# Altium PCB PCB1.PcbDoc (part 2 of 2)
Units mm, origin at the board's own origin, x right, y up, seen from the top; angles counter-clockwise.
Board outline 33.15 x 40.75 mm, 6 copper layers (Top Layer, GND, Signal Layer 3, POWER, Signal Layer 1, Bottom Layer), stack 1.231 mm thick; 110 components, 115 nets, 492 pads, 238 vias.
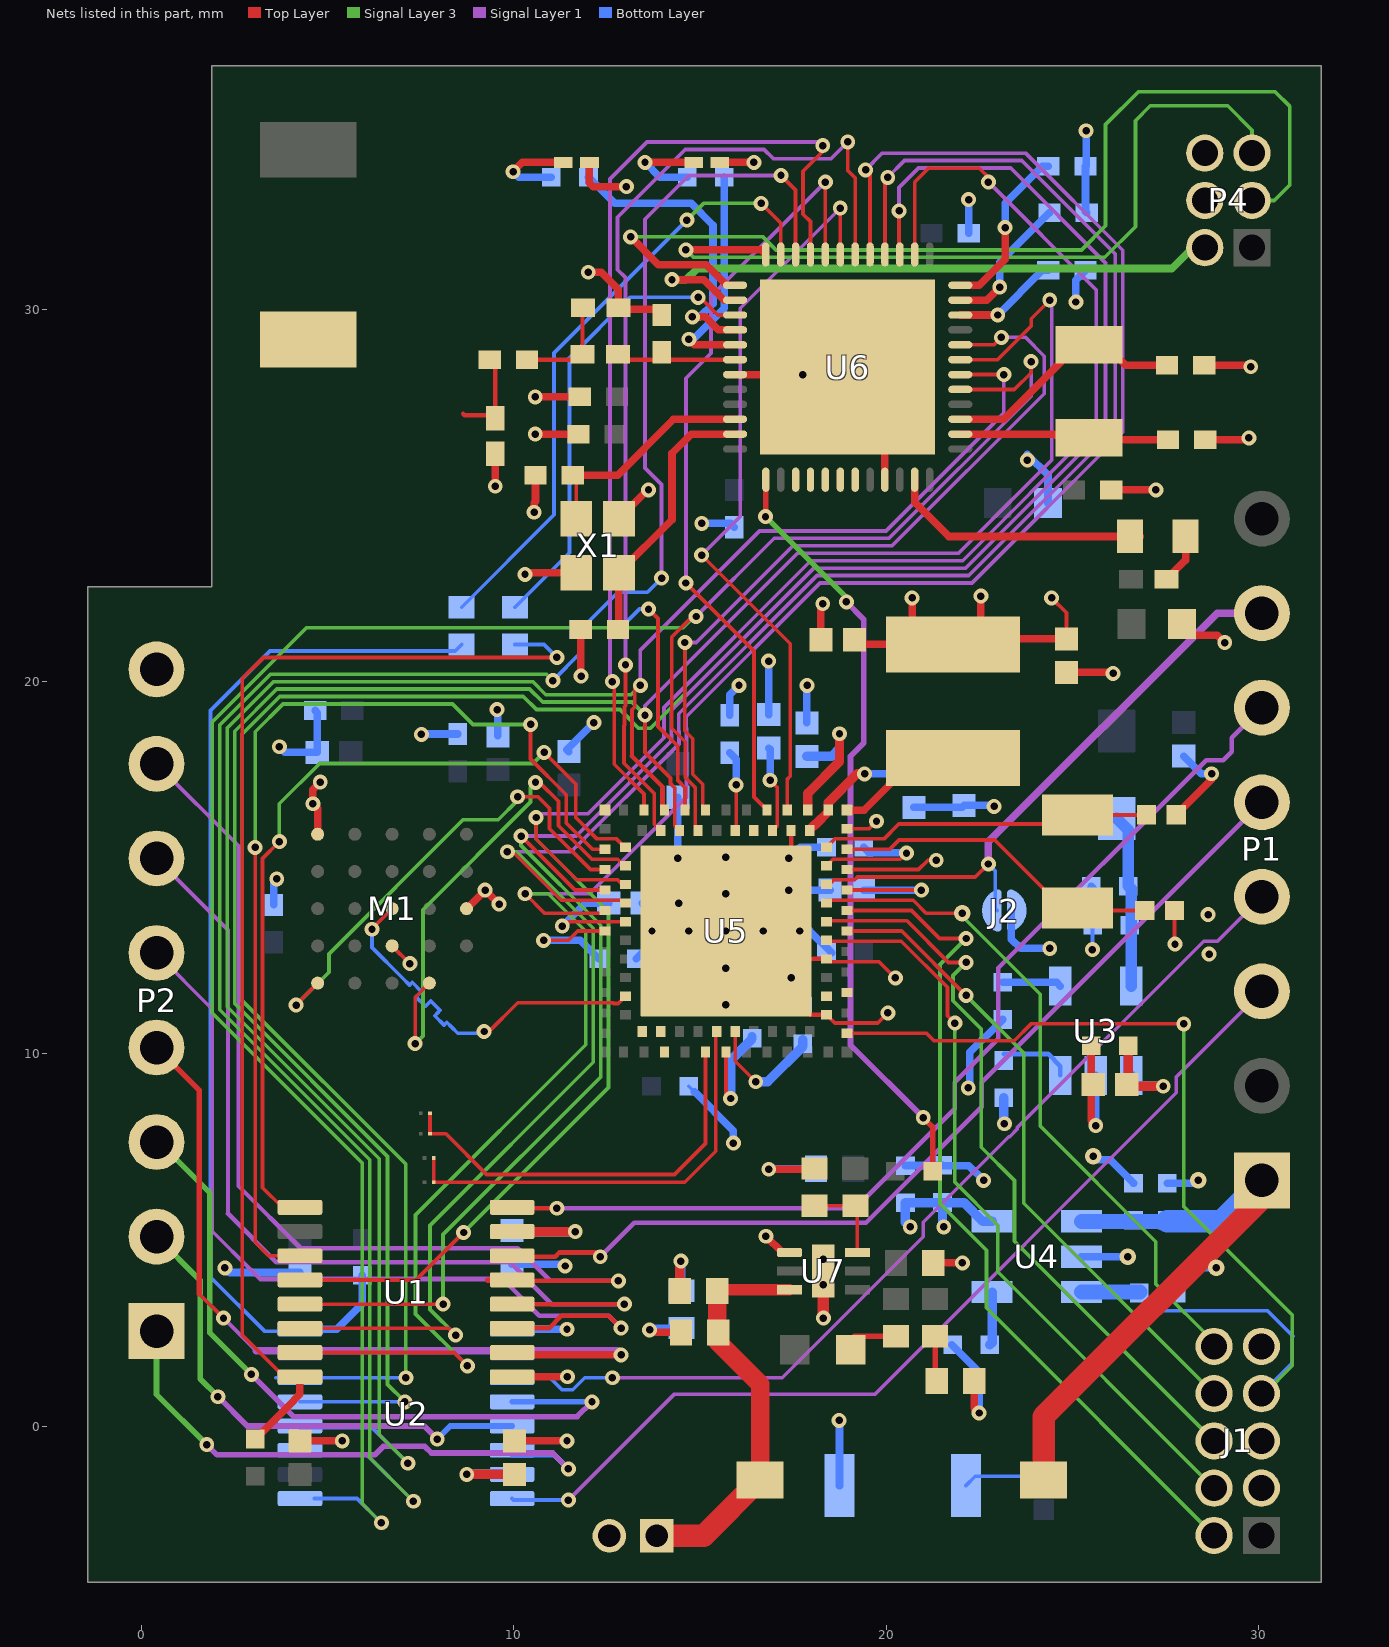
[diagram p6: the nets of this part, all layers, seen from the top]

## Via types
v1: diameter 0.4, hole 0.2, Top Layer to Bottom Layer, tented both sides, 130 vias
v2: diameter 0.4, hole 0.2, Top Layer to Bottom Layer, 86 vias
v3: diameter 0.66, hole 0.33, Top Layer to Bottom Layer, 16 vias
v4: diameter 0.45, hole 0.2, Top Layer to Bottom Layer, 5 vias
v5: diameter 0.45, hole 0.2, Top Layer to Bottom Layer, tented both sides, 1 vias

## Nets (pads, with @x,y where several pads share a name; then routed paths per layer and width w, separated by ;. In a path a pad name is that pad's centre, name@x,y a point inside that pad or via, vN(x,y) a via of type N, cw(c..) or ccw(c..) an arc to the next point about the centre after c; other vN are vias at no path point) (continued)
GND: C1.1 C2.2 C3.2 C4.2 C5.2 C6.1 C7.1 C8.1 C9.1 C10.1 C11.1 C12.1 C13.1 C14.1 C15.1 C16.1 C17.1 C18.1 C19.1 C20.1 C21.1 C22.1 C23.1 C24.1 C25.1 C26.1 C27.2 C29.1 C30.2 C31.1 C32.2 C33.1 C34.2 C35.2 C36.2 C37.2 C38.2 C39.2 C40.1 C41.1 C42.2 C43.1 C44.2 C45.2 C46.1 C47.1 C48.1 C49.2 C50.1 C52.1 C53.1 C54.1 C55.1 CObat1.2 D1.2 D2.2 J1.3 J1.5 J1.9 J2.2 M1.B3 M1.C1 M1.E5 P2.8 P4.4 P4.6 R6.2 R8.2 R9.2 R14.1 R15.1 R16.1 R17.1 SW1.2 U1.9 U2.9 U3.2 U4.2 U5.A31 U5.A33 U5.B21 U5.B24 U5.B32 U5.PAD U6.31 U6.45 U6.49 U7.1 U7.7 X1.2 X1.4 XX2.2 XX3.2 | length 123.4
  Top Layer w0.1: M1.B3@6.729,12.9 v1(7.207,12.422) ; U6.49@17.763,28.25 18.092,28.25 18.092,28.33 18.57,28.33 18.65,28.25 18.771,28.25 U6.49@18.971,28.45 ; U5.B21@18.4,11.05 18.625,10.825 19.775,10.825 v2(20.05,11.1) ; U5.B24@18.4,12.55 18.4,12.476 19.813,12.476 v1(20.25,12.039) ; U5.A31@18.95,14.95 20.875,14.95 21.125,15.2 v2(21.35,15.2) ; U5.A33@18.95,16.05 19.544,16.05 v1(19.744,16.25) ; v1@26.074,20.25 v1(26.102,20.222) ; C29.1@27.75,13.85 27.75,12.965 v1(27.765,12.95)
  Top Layer w0.125: U5.PAD@14.7,11.313 15.187,11.313 15.262,11.388 15.262,12.862 U5.PAD@15.7,13.3 ; U5.PAD@14.95,14.05 U5.PAD@15.7,13.3 ; U5.PAD@17.45,15.05 U5.PAD@15.7,13.3 ; U5.PAD@17.45,15.287 U5.B32@17.45,16 ; U5.B21@18.4,11.05 17.95,11.05 U5.PAD@16.5,12.5 ; U5.B24@18.4,12.55 16.55,12.55 U5.PAD@16.5,12.5 ; U5.A33@18.95,16.05 U5.A33@18.995,16.005 ; U5.PAD@15.7,13.3 U5.PAD@16.5,12.5
  Top Layer w0.203: C1.1@4.25,-0.4 v1(5.391,-0.4) ; M1.E5@4.729,15.9 4.729,16.591 v1(4.6,16.721) 4.6,17.1 v1(4.8,17.3) ; M1.C1@8.729,13.9 v1(9.229,14.4) v1(9.605,14.025) ; v1(9.5,25.251) 9.5,25.781 ; U1.9@9.954,1.325 v1(11.438,1.325) ; C27.2@10.015,-0.4 v1(11.429,-0.4) ; v2(10.301,22.879) 10.347,22.925 X1.2@11.675,22.925 ; v1(10.544,24.55) 10.544,24.811 10.582,24.85 C36.2@10.582,25.55 ; v2(10.575,26.65) C39.2@11.737,26.65 ; v2(10.575,27.65) C40.1@11.772,27.65 ; C36.2@10.592,25.583 C36.2@10.625,25.55 ; C45.2@11.801,21.4 11.801,20.157 v2(11.809,20.149) ; v1(12,31) 12.352,31 12.809,30.543 XX2.2@12.809,30.05 12.859,30 13.82,30 C41.1@13.97,29.85 ; D1.2@12.032,33.95 12.032,33.406 12.139,33.3 v2(13.025,33.3) ; X1.4@12.825,24.375 13.6,25.15 v2(13.619,25.15) ; v1(13.648,2.583) 13.712,2.519 C50.1@14.49,2.519 ; v1(14.4,15.258) U5.PAD@14.4,15.287 ; D2.2@15.538,33.95 v2(16.451,33.95) ; U6.31@15.946,28.25 15.946,28.248 16.817,28.248 16.817,28.382 17.631,28.382 17.763,28.25 v1(17.765,28.248) ; v1(16.771,5.1) 17.208,4.663 U7.1@17.405,4.663 ; v1(16.85,6.9) 18.058,6.9 R16.1@18.076,6.918 ; v1(17.45,12.05) U5.PAD@17.45,12.095 ; C20.1@18.25,21.125 18.25,22.044 v1(18.3,22.094) ; U6.49@18.971,28.45 19.195,28.226 19.039,28.226 19.039,27.63 19.351,27.318 19.947,27.318 19.947,27.474 19.971,27.45 19.971,27.002 20.103,27.002 20.103,26.43 19.971,26.298 U6.45@19.971,25.425 ; R15.1@21.267,4.383 v1(22.05,4.383) ; R14.1@22.367,1.213 22.367,0.483 v2(22.5,0.35) ; C19.1@24.85,20.25 v1@26.074,20.25 ; C5.2@25.51,10.221 25.51,8.197 v2(25.635,8.072) ; C44.2@26.05,25.15 v1(27.25,25.15) ; C22.1@27.8,16.425 28.75,17.375 v1(28.75,17.526) ; C43.1@27.95,21.55 27.95,21.25 28.898,21.25 v2(29.1,21.048) ; C37.2@28.55,28.5 29.759,28.5 v2(29.8,28.459) ; C34.2@28.577,26.5 29.7,26.5 v2(29.75,26.55)
  Top Layer w0.305: v1(18.317,2.9) v1(18.317,3.8) U7.7@18.317,4.163 v1(18.317,4.483)
  Signal Layer 1 w0.203: v1@4.777,17.304 4.796,17.304 v1(4.8,17.3) ; v1(17.765,28.248) v1@17.768,28.25
  Bottom Layer w0.1: C11.1@14.7,9.13 C11.1@14.855,8.975 ; v1@17.78,19.8 v1@17.873,19.893 ; v1@22.879,16.675 v1(22.904,16.65) ; C3.2@25.51,14.507 25.51,13.49 C4.2@25.55,13.45 25.55,12.806 v1(25.544,12.8)
  Bottom Layer w0.125: C10.1@17.768,11.275 C10.1@17.825,11.332
  Bottom Layer w0.203: v1(2.238,4.25) 2.362,4.125 C25.1@4.254,4.125 ; C21.1@3.55,14 3.55,14.621 v2(3.629,14.7) ; v1(3.7,18.25) 3.85,18.1 C26.1@4.718,18.1 4.718,19.168 C53.1@4.662,19.225 ; v1(4.8,17.3) v1@4.8,17.367 ; v1(7.519,18.584) 7.528,18.594 C54.1@8.495,18.594 ; v1(9.55,19.25) 9.57,19.23 C18.1@9.57,18.544 ; C2.2@9.951,4.35 11.326,4.35 v1(11.376,4.3) ; U2.9@9.954,2.6 v1(11.429,2.6) ; C9.1@11.48,18.12 11.425,18.175 v1(12.15,18.9) ; C12.1@13.286,12.55 13.713,12.977 U5.PAD@13.713,13.3 ; C14.1@13.45,14.05 v1(14.433,14.05) 14.433,13.467 U5.PAD@14.65,13.25 ; v1(13.648,2.583) 13.698,2.633 R17.1@14.5,2.633 ; v1(14.4,15.258) 14.408,15.25 C15.1@14.408,16.894 ; C11.1@14.855,8.975 15.9,7.93 v1(15.9,7.6) ; v2(15.05,24.25) 15.822,24.25 C38.2@15.922,24.15 ; U5.PAD@15.7,11.313 15.807,11.42 C8.1@16.409,11.42 ; C55.1@15.8,19.094 15.8,19.65 v1(16.05,19.9) ; v1(16.846,20.55) 16.85,20.546 C17.1@16.85,19.113 ; v1(16.85,6.9) 16.863,6.913 C52.1@18.117,6.913 ; v1(17.393,14.4) C7.1@18.5,14.4 ; v1(17.393,15.25) 17.693,15.55 C6.1@18.4,15.55 ; v1(17.45,12.05) 17.768,11.732 C10.1@17.768,11.275 ; U5.PAD@17.687,13.3 17.95,13.3 C13.1@18.537,12.712 ; C16.1@17.873,18.893 v1@17.873,19.893 ; v1(18.738,0.15) 18.75,0.138 SW1.2@18.75,-1.6 ; C32.2@20.522,6.994 22.227,6.994 v1(22.622,6.6) ; C32.2@20.532,7.005 C33.1@21.517,7.005 ; C24.1@20.75,16.623 22.048,16.623 C23.1@22.1,16.675 v1@22.879,16.675 ; C31.1@21.764,2.181 22.5,1.445 v2(22.5,0.35) ; v2(22.21,9.083) 22.252,9.124 22.252,10.041 C30.2@23.132,10.922 ; v2(22.219,32.95) 22.222,32.947 C42.2@22.222,32.05 ; J2.2@23.367,13.85 23.367,13.083 23.616,12.834 v1(24.4,12.834) v1@24.404,12.838 ; v2(23.8,25.95) 23.8,26.102 24.353,25.549 C35.2@24.353,24.8 ; v2(25.1,30.2) 25.1,30.79 R9.2@25.36,31.05 ; U4.2@25.25,4.549 v5(26.493,4.549) ; v1(25.377,34.8) 25.377,33.85 R6.2@25.36,33.85 25.36,32.632 R8.2@25.392,32.6 ; C3.2@25.51,14.507 25.55,14.468 C4.2@25.55,13.45 ; v4(25.567,7.25) 25.567,7.15 26.025,7.15 C49.2@26.65,6.525 ; v2(25.635,8.072) U3.2@25.635,9.42 ; C48.1@27.554,6.525 28.315,6.525 v4(28.39,6.6) ; C47.1@28,18 28.474,17.526 v1(28.75,17.526)
  other v1: 17.88,19.9
GPIO_A2_1V8: U1.3 U5.A2 | length 27.4
  Top Layer w0.1: v2(3.05,15.545) 3.05,4.938 3.413,4.575 U1.3@4.254,4.575 ; v2(10.45,18.85) 10.45,17.92 11.409,16.962 11.409,16.2 12.109,15.5 U5.A2@12.45,15.5
  Signal Layer 3 w0.1: v2(3.05,15.545) 3.05,18.654 3.796,19.4 8.35,19.4 8.9,18.85 v2(10.45,18.85)
GPIO_A2_3V0: P1.5 U1.14 | length 25.7
  Top Layer w0.125: U1.14@9.954,4.575 9.98,4.549 11.112,4.549 11.226,4.662 12.208,4.662 v1(12.322,4.549)
  Signal Layer 1 w0.125: v1(12.322,4.549) 13.235,5.463 19.463,5.463 22.573,8.573 22.573,9.233 P1.5@30.1,16.76
GPIO_A3_1V8: U1.1 U5.B1 | length 23.2
  Top Layer w0.1: v2(3.7,15.7) 3.25,15.25 3.25,6.404 3.779,5.875 U1.1@4.254,5.875 ; v1(10.814,18.1) 11.663,17.25 11.663,16.35 12.238,15.775 12.76,15.775 12.993,15.543 U5.B1@13,15.55
  Signal Layer 3 w0.1: v2(3.7,15.7) 3.7,16.717 4.783,17.8 10.514,17.8 v1(10.814,18.1)
GPIO_A3_3V0: P1.6 U1.16 | length 27.5
  Top Layer w0.125: U1.16@9.954,5.875 9.979,5.85 v1(11.158,5.85)
  Signal Layer 1 w0.125: v1(11.158,5.85) 19.172,5.85 21.848,8.526 21.848,9.233 23.018,10.404 23.018,12.307 28.6,17.888 29.057,17.888 29.29,18.122 29.29,18.49 P1.6@30.1,19.3
HYPER.RWDS: M1.C3 U5.B9 | length 10.3
  Top Layer w0.1: v1(6.19,13.348) 6.19,13.36 M1.C3@6.729,13.9 ; v1(9.2,10.6) 9.225,10.575 9.305,10.575 10.104,11.374 12.662,11.374 12.682,11.355 12.805,11.355 U5.B9@13,11.55
  Bottom Layer w0.1: v1(6.19,13.348) 6.19,12.855 7,12.045 7.196,11.848 7.268,11.92 7.519,11.67 7.447,11.598 7.375,11.526 7.625,11.276 7.697,11.348 7.769,11.42 8.019,11.169 7.947,11.098 7.875,11.026 8.126,10.775 8.198,10.847 8.323,10.722 8.495,10.55 9.15,10.55 v1(9.2,10.6)
Mem_\R\S\T\O\1: M1.A2 U5.B2 | length 13.9
  Top Layer w0.1: v1(7.35,10.275) 7.35,11.521 M1.A2@7.729,11.9 ; v1(10.582,17.293) 10.69,17.293 11.2,16.783 11.2,16.126 12.1,15.225 12.795,15.225 12.97,15.05 U5.B2@13,15.05
  Signal Layer 3 w0.1: v1(7.35,10.275) 7.557,10.482 7.557,13.87 10.45,16.763 10.45,17.161 v1(10.582,17.293)
Mem_\R\S\T\O\2: U5.A14 | length 0
  Top Layer w0.1: U5.A14@14.05,10.05 U5.A14@14.076,10.024
Mem_INT1: M1.A5 U5.A3 | length 12.9
  Top Layer w0.1: v1(4.15,11.31) 4.15,11.321 M1.A5@4.729,11.9 ; v1(10.1,16.908) 10.65,16.908 10.958,16.6 10.958,16.05 12.058,14.95 U5.A3@12.45,14.95
  Signal Layer 3 w0.1: v1(4.15,11.31) 5.032,12.192 5.032,12.685 8.636,16.289 9.584,16.289 10.1,16.805 v1(10.1,16.908)
Mem_INT2: U5.B12
NetA1_1: A1.1 XX1.2 XX3.1 | length 2.5
  Top Layer w0.115: 8.636,27.2 8.677,27.159 9.416,27.159 XX3.1@9.499,27.075 9.499,28.507 XX1.2@9.356,28.65
NetC3_1: C3.1 C4.1 L5.1 U3.5 | length 4.7
  Bottom Layer w0.305: L5.1@26.201,16.325 26.51,16.016 C3.1@26.51,14.507 26.585,14.432 U3.5@26.585,11.82
NetC22_2: C22.2 U5.B30 X3.1 | length 9
  Top Layer w0.1: U5.B30@18.4,15.55 18.625,15.775 19.945,15.775 20.343,16.173 24.902,16.173 X3.1@25.147,16.417 26.992,16.417 C22.2@27,16.425
NetC28_1: C28.1 R14.2 | length 1.2
  Top Layer w0.15: C28.1@21.317,2.413 21.317,1.263 R14.2@21.367,1.213
NetC29_2: C29.2 U5.A32 X3.2 | length 8.9
  Top Layer w0.1: U5.A32@18.95,15.5 20.105,15.5 20.35,15.745 22.923,15.745 24.75,13.917 X3.2@25.147,13.917 25.214,13.85 C29.2@26.95,13.85
NetC30_1: C30.1 U3.4 | length 1.6
  Bottom Layer w0.203: C30.1@23.132,11.922 24.583,11.922 U3.4@24.685,11.82
NetC31_2: C31.2 U4.4 | length 1.4
  Bottom Layer w0.254: C31.2@22.79,2.181 22.85,2.241 U4.4@22.85,3.599
NetC41_2: C41.2 L4.1 U6.30 | length 3.2
  Top Layer w0.115: L4.1@12.947,28.65 U6.30@15.946,28.65
  Top Layer w0.203: L4.1@12.797,28.8 L4.1@12.947,28.65
NetC51_1: C51.1 R17.2 | length 1.6
  Top Layer w0.254: C51.1@14.462,3.633 14.462,4.405 v1(14.49,4.433)
  Bottom Layer w0.254: v1(14.49,4.433) 14.49,3.643 R17.2@14.5,3.633
NetD1_1: D1.1 R4.2 | length 2.5
  Top Layer w0.203: v2(9.98,33.7) 10.23,33.95 D1.1@11.332,33.95
  Bottom Layer w0.203: v2(9.98,33.7) 10.13,33.55 R4.2@11.007,33.55
NetD2_1: D2.1 R10.2 | length 2.6
  Top Layer w0.203: v2(13.525,33.95) D2.1@14.837,33.95
  Bottom Layer w0.203: v2(13.525,33.95) 13.925,33.55 R10.2@14.658,33.55
NetJ1.0_1: J1.0.1 J2.0.1 U5.A16 | length 11.2
  Top Layer w0.1: J1.0.1@7.75,8.4 J2.0.1@7.75,7.85 8.175,7.85 9.267,6.757 14.317,6.757 15.15,7.59 U5.A16@15.15,10.05
NetJ1.1_1: J1.1.1 J2.1.1 U5.B15 | length 11.8
  Top Layer w0.1: J1.1.1@7.85,7.2 J2.1.1@7.85,6.55 14.595,6.55 15.425,7.38 15.425,10.575 U5.B15@15.45,10.6
NetJ2_1: J2.1 P1.7 U5.B28 | length 16.4
  Top Layer w0.1: U5.B28@18.4,14.55 18.471,14.55 18.6,14.679 18.734,14.679 18.738,14.675 19.162,14.675 19.237,14.75 22.4,14.75 v2(22.75,15.1)
  Signal Layer 1 w0.203: v2(22.75,15.1) 22.75,15.694 28.896,21.84 P1.7@30.1,21.84
  Bottom Layer w0.1: v2(22.75,15.1) 22.932,14.918 22.932,13.91 J2.1@22.992,13.85
NetL1_2: L1.2 U5.D4 | length 2.2
  Top Layer w0.2: U5.D4@18.95,16.55 19.415,16.55 L1.2@20.668,17.803
NetL2_2: L2.2 L3.1 | length 1.4
  Top Layer w0.203: L2.2@27.533,22.75 28.052,23.269 L3.1@28.052,23.9
NetL3_2: L3.2 U6.47 | length 7
  Top Layer w0.203: U6.47@20.771,25.425 20.771,24.82 21.691,23.9 L3.2@26.827,23.9
NetLED1_1: LED1.1 R12.1 | length 1.3
  Top Layer w0.15: LED1.1@19.05,2.3 19.161,2.411 R12.1@20.267,2.411 ; R12.1@20.123,2.266 R12.1@20.169,2.313
NetP1_3: P1.3 U2.16 | length 26.1
  Signal Layer 1 w0.1: v1(11.466,-1.989) 14.305,0.85 19.698,0.85 27.8,8.952 27.8,9.38 P1.3@30.1,11.68
  Bottom Layer w0.1: U2.16@9.954,-1.95 9.993,-1.989 v1(11.466,-1.989)
NetP1_4: P1.4 U2.11 | length 26
  Signal Layer 1 w0.1: v1(12.65,1.298) 17.211,1.298 21,5.088 21,5.473 23.299,7.772 23.324,7.772 23.529,7.977 23.529,8.018 28.538,13.027 28.907,13.027 P1.4@30.1,14.22
  Bottom Layer w0.1: U2.11@9.954,1.3 9.956,1.298 10.97,1.298 11.293,0.975 11.583,0.975 11.906,1.298 v1(12.65,1.298)
NetP2_1: P2.1 U2.14 | length 15.6
  Signal Layer 1 w0.15: v1(1.75,-0.5) 2.025,-0.775 6.262,-0.775 6.492,-0.545 7.608,-0.545 7.788,-0.725 11.041,-0.725 v1(11.466,-1.15)
  Signal Layer 3 w0.15: P2.1@0.4,2.55 0.4,0.85 v1(1.75,-0.5)
  Bottom Layer w0.15: U2.14@9.954,-0.65 9.954,-0.775 11.091,-0.775 v1(11.466,-1.15)
NetP2_2: P2.2 U2.13 | length 13.5
  Signal Layer 1 w0.15: v1(2.05,0.788) 2.837,0 7.593,0 v1(7.943,-0.35)
  Signal Layer 3 w0.15: P2.2@0.4,5.09 1.575,3.915 1.575,1.263 v1(2.05,0.788)
  Bottom Layer w0.15: v1(7.943,-0.35) 8.293,0 U2.13@9.954,0
NetP2_3: P2.3 U2.12 | length 19.3
  Signal Layer 1 w0.15: v1(2.95,1.386) 4.086,0.25 11.7,0.25 v1(12.1,0.65)
  Signal Layer 3 w0.15: P2.3@0.4,7.63 0.47,7.63 1.825,6.275 1.825,2.511 v1(2.95,1.386)
  Bottom Layer w0.15: U2.12@9.954,0.65 v1(12.1,0.65)
NetR1_1: R1.1 R20.1 U2.8 | length 28.5
  Bottom Layer w0.1: U2.8@4.254,2.6 4.204,2.55 3.3,2.55 1.85,4 1.85,19.225 3.449,20.824 8.424,20.824 R20.1@8.6,21
  Bottom Layer w0.203: U2.8@4.254,2.6 5.246,2.6 5.931,3.284 R1.1@5.931,4.05
NetR2_1: R2.1 U3.3 | length 1.9
  Bottom Layer w0.125: R2.1@23.16,9.997 24.353,9.997 24.685,9.665 U3.3@24.685,9.42
NetR3_1: R3.1 U4.3 | length 1.6
  Bottom Layer w0.4: U4.3@25.25,3.599 R3.1@26.824,3.599
NetR4_1: R4.1 U6.28 | length 8
  Top Layer w0.203: v2(14.8,29.8) 15.138,29.8 15.487,29.45 U6.28@15.946,29.45
  Bottom Layer w0.203: R4.1@12.007,33.55 12.707,32.85 14.768,32.85 15.352,32.266 15.352,30.159 14.993,29.8 v2(14.8,29.8)
NetR6_1: R6.1 U6.12 | length 4.6
  Top Layer w0.203: U6.12@21.996,30.65 22.506,30.65 23.2,31.344 v2(23.2,32.2)
  Bottom Layer w0.203: v2(23.2,32.2) 23.2,32.85 24.2,33.85 R6.1@24.36,33.85
NetR7_1: R7.1 R19.2 U1.8 | length 31.4
  Top Layer w0.1: U1.8@3.825,1.325 2.7,2.45 2.7,20.075 3.275,20.65 v2(11.158,20.65)
  Top Layer w0.203: R7.1@3.05,-0.35 3.95,0.55 4.254,0.854 U1.8@4.254,1.325
  Bottom Layer w0.1: R19.2@10.031,21 10.808,21 v2(11.158,20.65)
NetR8_1: R8.1 U6.11 | length 3.8
  Top Layer w0.203: U6.11@21.996,30.25 22.705,30.25 v2(23.055,30.6)
  Bottom Layer w0.203: v2(23.055,30.6) 23.055,31.263 R8.1@24.392,32.6
NetR9_1: R9.1 U6.10 | length 2.9
  Top Layer w0.203: U6.10@21.996,29.85 v2(23.003,29.85)
  Bottom Layer w0.203: v2(23.003,29.85) 24.203,31.05 R9.1@24.36,31.05
NetR10_1: R10.1 U6.29 | length 6.1
  Top Layer w0.203: v2(14.703,29.2) 14.853,29.05 U6.29@15.946,29.05
  Bottom Layer w0.203: v2(14.703,29.2) 14.822,29.2 15.658,30.036 R10.1@15.658,33.55
NetR11_1: R11.1 U5.A41 | length 6.9
  Top Layer w0.1: v2(13.619,21.95) 13.875,21.694 13.875,18.797 14.408,18.265 14.408,17.344 14.6,17.151 U5.A41@14.6,16.55
  Bottom Layer w0.1: R11.1@12.801,21.4 12.824,21.4 13.374,21.95 v2(13.619,21.95)
NetR11_2: R11.2 U2.3 U6.22 | length 56.9
  Top Layer w0.1: v2(17.178,33.6) 17.571,33.207 U6.22@17.571,31.475
  Signal Layer 1 w0.1: v2(13.969,22.781) 13.969,25.295 13.525,25.739 13.525,32.422 14.703,33.6 v2(17.178,33.6)
  Signal Layer 3 w0.1: v2(7.3,-2.022) 6.131,-0.853 6.131,7.152 2.1,11.183 2.1,18.835 3.465,20.2 10.878,20.2 v2(11.05,20.028)
  Bottom Layer w0.1: U2.3@4.254,-0.65 4.254,-0.75 6.028,-0.75 v2(7.3,-2.022) ; v2(11.05,20.028) 11.801,20.779 R11.2@11.801,21.4 12.801,22.4 13.589,22.4 v2(13.969,22.781)
NetR13_1: R13.1 R16.2 U7.6 | length 2.4
  Top Layer w0.1: R16.2@18.076,5.918 R13.1@19.176,5.918 19.23,5.864 U7.6@19.23,4.663
NetR19_1: R19.1 U6.27 | length 12.6
  Top Layer w0.1: v1(14.95,30.325) 15.005,30.325 15.48,29.85 U6.27@15.946,29.85
  Bottom Layer w0.1: R19.1@10.031,22 11.495,23.464 11.495,28.695 13.125,30.325 v1(14.95,30.325)
NetR20_2: R20.2 U6.23 | length 16.7
  Top Layer w0.1: v2(16.646,32.85) 17.171,32.325 U6.23@17.171,31.475
  Signal Layer 3 w0.1: v2(14.65,32.4) 15.1,32.85 v2(16.646,32.85)
  Bottom Layer w0.1: R20.2@8.6,22 11.081,24.481 11.081,28.831 v2(14.65,32.4)
NetU2_1: U2.1 U5.B37 U6.5 | length 60.8
  Top Layer w0.1: v2(14.897,21.75) 14.8,21.75 14.245,21.196 14.245,18.746 14.608,18.383 14.608,17.427 14.876,17.159 14.876,16.075 U5.B37@14.95,16 ; U6.5@21.996,27.85 21.999,27.847 23.447,27.847 23.9,28.3 v2(23.9,28.6)
  Signal Layer 1 w0.1: v2(14.897,21.75) 16.997,23.85 20.08,23.85 23.9,27.67 v2(23.9,28.6)
  Signal Layer 3 w0.1: v2(6.44,-2.6) 5.931,-2.09 5.931,7.069 1.9,11.1 1.9,18.918 4.432,21.45 14.55,21.45 14.85,21.75 v2(14.897,21.75)
  Bottom Layer w0.1: U2.1@4.64,-1.95 5.79,-1.95 v2(6.44,-2.6)
NetU2_4: U2.4 U5.A42 U6.6 | length 56.3
  Top Layer w0.1: 13.175,17.999 13.175,19.245 13.25,19.32 v2@13.25,19.9 ; U6.6@21.996,28.25 v2(23.167,28.25)
  Top Layer w0.125: 13.175,17.999 13.995,17.178 13.995,16.655 U5.A42@14.05,16.6
  Signal Layer 1 w0.1: v2(13.4,19.9) 13.4,20.851 16.599,24.05 19.997,24.05 23.167,27.22 v2(23.167,28.25)
  Signal Layer 3 w0.1: v2(7.154,-1) 6.387,-0.233 6.387,7.178 2.3,11.266 2.3,18.752 3.548,20 10.508,20 10.858,19.65 13.15,19.65 v2(13.4,19.9)
  Bottom Layer w0.1: U2.4@4.254,-0.05 6.204,-0.05 v2(7.154,-1) ; v2@23,28.232 23.018,28.25 v2(23.167,28.25)
NetU2_5: U2.5 U5.B38 U6.7 | length 59.4
  Top Layer w0.1: v1(13.525,19.1) 13.525,18.094 14.208,17.411 14.208,17.261 14.326,17.143 14.326,16.124 U5.B38@14.45,16 ; U6.7@21.996,28.65 22.995,28.65 23.9,29.555 23.9,29.75 v2(24.4,30.25)
  Signal Layer 1 w0.1: v1(13.525,19.1) 13.525,19.35 17.625,23.45 21.95,23.45 24.45,25.95 24.45,30.2 v2(24.4,30.25)
  Signal Layer 3 w0.1: v2(7.074,0.65) 6.606,1.119 6.606,7.243 2.5,11.349 2.5,18.669 3.631,19.8 10.425,19.8 10.775,19.45 13.175,19.45 v1(13.525,19.1)
  Bottom Layer w0.1: U2.5@4.254,0.65 v2(7.074,0.65)
NetU2_6: U2.6 U5.A40 U6.8 | length 58.4
  Top Layer w0.1: v2(14.595,21.051) 14.595,18.678 14.808,18.466 14.808,17.51 15.076,17.242 15.076,16.625 U5.A40@15.15,16.55 ; U6.8@21.996,29.05 22.9,29.05 v2(23.1,29.25)
  Signal Layer 1 w0.1: v2(14.595,21.051) 14.904,21.051 17.503,23.65 20.162,23.65 24.25,27.738 24.25,28.745 23.745,29.25 v2(23.1,29.25)
  Signal Layer 3 w0.1: v2(7.1,1.298) 7.1,7.031 2.7,11.431 2.7,18.586 3.714,19.6 10.256,19.6 10.606,19.25 12.85,19.25 13.35,18.75 13.67,18.75 14.595,19.675 v2(14.595,21.051)
  Bottom Layer w0.1: U2.6@4.254,1.3 3.604,1.3 3.604,1.298 v2(7.1,1.298)
NetU5_A36: U5.A36 U6.19 | length 20
  Top Layer w0.1: v2(15.047,23.4) 15.345,23.102 15.345,23.1 17.425,21.02 17.425,17.46 17.35,17.385 U5.A36@17.35,16.55 ; U6.19@18.771,31.475 v2(18.771,32.721)
  Signal Layer 1 w0.1: v2(15.047,23.4) 16.081,24.433 16.081,30.031 v2(18.771,32.721)
NetU5_A37: U5.A37 U6.20 | length 21.3
  Top Layer w0.1: v2(14.625,22.65) 16.451,20.824 16.451,16.899 U5.A37@16.8,16.55 ; U6.20@18.371,31.475 v2(18.371,33.423)
  Signal Layer 1 w0.1: v2(14.625,22.65) 14.625,28.15 15.3,28.825 15.3,30.352 v2(18.371,33.423)
NetU5_A43: U5.A43 U6.21 | length 26.7
  Top Layer w0.1: v1(12.65,20) 12.7,19.95 12.7,17.782 13.5,16.982 U5.A43@13.5,16.55 ; U6.21@17.971,31.475 17.971,32.36 17.771,32.56 17.771,33.716 18.3,34.245 v2(18.3,34.4)
  Signal Layer 1 w0.1: v1(12.65,20) 12.587,20.063 12.587,33.507 13.58,34.5 18.2,34.5 v2(18.3,34.4)
NetU5_B39: U5.B39 U6.18 | length 27.3
  Top Layer w0.1: v2(13,20.45) 13,19.353 12.975,19.328 12.975,18.825 12.963,18.813 12.963,17.807 13.774,16.995 13.774,16.176 U5.B39@13.95,16 ; v2(18.971,34.5) 18.971,33.734 19.171,33.534 U6.18@19.171,31.475
  Signal Layer 1 w0.1: v2(13,20.45) 13,30.855 12.787,31.068 12.787,32.478 14.608,34.3 16.725,34.3 16.975,34.05 18.521,34.05 v2(18.971,34.5)
P0.00/XL1: C34.1 U6.2 X2.1 | length 5.8
  Top Layer w0.203: U6.2@21.996,26.65 24.55,26.65 X2.1@25,26.2 ; X2.1@24.922,26.2 X2.1@25.422,26.2 ; X2.1@25.45,26.55 25.5,26.5 C34.1@27.577,26.5
P0.01/XL2: C37.1 U6.3 X2.2 | length 6.1
  Top Layer w0.203: U6.3@21.996,27.05 23.159,27.05 X2.2@24.972,28.862 ; X2.2@25.45,29.05 25.893,29.05 26.443,28.5 C37.1@27.55,28.5
P0.21/RESET: P4.5 U6.24 | length 22
  Top Layer w0.203: v2(14.625,31.6) 16.646,31.6 U6.24@16.771,31.475
  Signal Layer 3 w0.1: v2(14.625,31.6) 14.825,31.4 25.877,31.4 26.701,32.224 26.701,35.072 27.099,35.47 29.18,35.47 29.835,34.815 P4.5@29.835,34.2 ; P4.5@29.45,33.95 P4.5@29.635,33.765
P0.25: R18.1 U6.37 | length 20.8
  Top Layer w0.15: v1@21.039,8.25 21.253,8.035 R18.1@21.253,6.85 R18.1@21.291,6.812
  Top Layer w0.152: v1(16.762,24.433) 16.771,24.442 U6.37@16.771,25.425
  Signal Layer 1 w0.152: v1(18.935,22.143) 19.404,21.673 19.404,18.354 19.047,17.997 19.047,10.241 v1(21,8.289)
  Signal Layer 3 w0.152: v1(16.762,24.433) 18.935,22.261 v1(18.935,22.143)
  Bottom Layer w0.152: v1(21,8.289) v1@21.039,8.25
P0.27: U6.39
P0.28/AIN4: U6.40
P0.29/AIN5: U6.41
P0.30/AIN6: U6.42
P0.31/AIN7: U6.43
PULP_\R\S\T\: J1.7 R5.1 SW1.1 U5.A23 | length 34.6
  Top Layer w0.1: U5.A23@18.95,10.55 21.088,10.55 21.288,10.35 23.443,10.35 23.898,10.805 v1(28,10.805)
  Signal Layer 3 w0.1: v1(28,10.805) 28,5.9 30.913,2.987 30.913,1.617 30.167,0.87 J1.7@30.085,0.87
  Bottom Layer w0.1: SW1.1@22.15,-1.6 22.4,-1.35 R5.1@24.243,-1.35 24.243,0.143 27.2,3.1 30.25,3.1 30.937,2.413 30.913,2.388 30.913,1.698 J1.7@30.085,0.87
PULP_I2C.SCL: U5.A25
PULP_I2C.SDA: U5.B22
PULP_JTAG.\T\R\S\T\: J1.10 U5.B27 | length 18.4
  Top Layer w0.1: U5.B27@18.4,14.05 18.4,14.124 20.731,14.124 21.078,13.777 v4(22.05,13.777)
  Signal Layer 3 w0.1: v4(22.05,13.777) 22.05,13.694 24.144,11.6 24.144,8.06 27.25,4.954 27.25,3.815 28.87,2.195 J1.10@28.815,2.14
PULP_JTAG.TCK: J1.4 U5.B25 | length 20.4
  Top Layer w0.1: U5.B25@18.4,13.05 18.4,13.025 20.412,13.025 21.65,11.788 21.65,11.025 v2(21.85,10.825)
  Signal Layer 1 w0.1: 21.85,10.6 v2(21.85,10.825)
  Signal Layer 3 w0.1: v2(21.85,10.825) 21.85,6.55 23.003,5.397 23.003,4.142 J1.4@28.815,-1.67
PULP_JTAG.TDI: J1.8 U5.A28 | length 17.4
  Top Layer w0.1: U5.A28@18.95,13.3 20.421,13.3 v2(22.15,11.571)
  Signal Layer 3 w0.1: v2(22.15,11.571) 23.7,10.021 23.7,5.985 J1.8@28.815,0.87
PULP_JTAG.TDO: J1.6 U5.B26 | length 20.1
  Top Layer w0.1: U5.B26@18.4,13.55 18.4,13.574 20.561,13.574 21.68,12.455 v2(22.15,12.455)
  Signal Layer 3 w0.1: v2(22.15,12.455) 21.8,12.105 21.8,11.426 22.56,10.666 22.56,7.49 23.45,6.6 23.45,4.965 J1.6@28.815,-0.4
PULP_JTAG.TMS: J1.2 U5.A29 | length 22.9
  Top Layer w0.1: U5.A29@18.95,13.85 20.686,13.85 21.438,13.099 v2(22.15,13.099)
  Signal Layer 3 w0.1: v2(22.15,13.099) 21.45,12.399 21.45,5.971 22.7,4.721 22.7,3.175 J1.2@28.815,-2.94
PULP_SPI_1V8.MISO: U1.5 U5.A4 U6.15 | length 55.7
  Top Layer w0.1: U1.5@4.254,3.275 v2(8.1,3.275) ; v1(10.195,15.85) 11.645,14.4 U5.A4@12.45,14.4 ; v2(20.35,32.65) 20.35,31.496 U6.15@20.371,31.475
  Signal Layer 1 w0.1: v1(10.195,15.85) 11.677,15.85 14.237,18.409 14.237,18.575 14.233,18.579 14.233,19.221 18.062,23.05 22.142,23.05 25.9,26.808 25.9,31.25 23.35,33.8 20.875,33.8 20.35,33.275 v2(20.35,32.65)
  Signal Layer 3 w0.1: v2(8.1,3.275) 8.1,5.145 12.334,9.379 12.334,13.456 10.195,15.595 v1(10.195,15.85)
PULP_SPI_1V8.MOSI: U1.4 U5.B3 U6.14 | length 54
  Top Layer w0.1: U1.4@4.254,3.925 7.375,3.925 v2(8.65,5.2) ; v1(10.6,16.35) 10.6,15.765 11.69,14.675 12.789,14.675 12.914,14.55 U5.B3@13,14.55 ; U6.14@20.771,31.475 20.771,33.421 21.143,33.793 ; 21.178,33.8 21.171,33.793 22.507,33.793 22.75,33.55 v2(22.75,33.421)
  Signal Layer 1 w0.1: v1(10.6,16.35) 10.6,16.409 10.641,16.45 11.995,16.45 14.037,18.492 14.033,18.496 14.033,19.304 17.979,23.25 22.059,23.25 25.65,26.841 25.65,30.521 v2(22.75,33.421)
  Signal Layer 3 w0.1: v2(8.65,5.2) 12.547,9.097 12.547,13.818 10.6,15.765 v1(10.6,16.35)
PULP_SPI_1V8.SCK: U1.6 U5.B4 U6.16 | length 59.9
  Top Layer w0.1: U1.6@4.254,2.625 8.255,2.625 v2(8.437,2.443) ; v1(9.829,15.429) 9.971,15.429 11.275,14.124 12.885,14.124 12.959,14.05 U5.B4@13,14.05 ; U6.16@19.971,31.475 19.971,33.473 v2(20.048,33.55)
  Signal Layer 1 w0.1: v1(9.829,15.429) 11.54,15.429 14.437,18.326 14.437,18.658 14.433,18.662 14.433,19.138 18.144,22.85 22.225,22.85 26.158,26.783 26.158,31.492 23.65,34 20.498,34 v2(20.048,33.55)
  Signal Layer 3 w0.1: v2(8.437,2.443) 7.75,3.13 7.75,5.389 12.132,9.771 12.132,13.375 10.078,15.429 v1(9.829,15.429)
PULP_SPI_3V0.MISO: P2.6 U1.12 | length 25
  Top Layer w0.125: U1.12@9.954,3.275 v1(12.972,3.275)
  Signal Layer 1 w0.1: P2.6@0.4,15.25 2.322,13.328 2.322,5.7
  Signal Layer 1 w0.125: 2.322,5.7 3.622,4.4 9.9,4.4 11.025,3.275 v1(12.972,3.275)
PULP_SPI_3V0.MOSI: P2.7 U1.13 | length 27.7
  Top Layer w0.125: U1.13@9.954,3.925 9.291,3.925 9.291,3.9 v1(12.809,3.9)
  Signal Layer 1 w0.1: P2.7@0.4,17.79 2.6,15.59 2.6,6.45 3.45,5.6
  Signal Layer 1 w0.125: 3.45,5.6 4.275,4.775 10.108,4.775 10.983,3.9 v1(12.809,3.9)
PULP_SPI_3V0.SCK: P2.5 U1.11 | length 24
  Top Layer w0.125: P2.5@0.4,12.4 P2.5@0.4,12.71 ; U1.11@9.954,2.625 9.961,2.633 10.949,2.633 11.279,2.962 12.555,2.962 v1(12.885,2.633)
  Signal Layer 1 w0.1: P2.5@0.4,12.71 0.4,12.7 1.9,11.2 1.9,5.233 2.954,4.179
  Signal Layer 1 w0.125: 2.954,4.179 3.183,3.95 9.7,3.95 10.687,2.963 12.555,2.963 v1(12.885,2.633) ; 11.279,2.962 11.579,2.962
PULP_TIMER0Ch0: U5.B11
PULP_VCC: C6.2 C7.2 C8.2 C10.2 C12.2 C14.2 C16.2 C17.2 C19.2 C20.2 C55.2 L1.1 U5.A6 U5.A17 U5.A30 U5.A35 U5.B5 U5.B16 U5.B29 U5.B33 U5.B35 | length 39.2
  Top Layer w0.1: v1(10.8,13.05) 11.467,13.05 11.717,13.3 U5.A6@12.45,13.3 ; v1(11.3,13.43) 11.3,13.48 11.37,13.55 U5.B5@13,13.55 ; U5.A17@15.7,10.05 15.7,8.925 v1(15.825,8.8) ; U5.B16@15.95,10.6 15.95,9.8 v1(16.5,9.25) ; U5.B35@15.95,16 15.974,16.025 v1(15.974,17.224) ; v1(16.886,17.35) 17.074,17.161 17.074,16.125 U5.B33@16.95,16 ; U5.B29@18.4,15.05 18.576,15.225 20.383,15.225 v1(20.55,15.392) ; U5.A30@18.95,14.4 v1(20.95,14.4) ; C20.2@19.15,21.125 C20.2@19.273,21.002 ; L1.1@20.7,21.618 21.068,21.25 21.55,21.25 L1.1@21.799,21.002 21.947,21.15 22.55,21.753 ; v1(24.45,22.25) 24.85,21.85 C19.2@24.85,21.15
  Top Layer w0.203: C20.2@19.273,21.002 L1.1@21.799,21.002 ; L1.1@20.7,21.618 v1(20.7,22.25) ; L1.1@21.947,21.15 C19.2@24.85,21.15 ; 22.55,21.753 v1(22.55,22.3)
  Top Layer w0.254: U5.A35@17.9,16.55 17.9,17 18.75,17.85 v1(18.75,18.6)
  Bottom Layer w0.203: v1(10.8,13.05) 11.786,13.05 C12.2@12.286,12.55 ; v1(11.3,13.43) 11.92,14.05 C14.2@12.55,14.05 ; C55.2@15.8,18.094 15.974,17.919 v1(15.974,17.224) ; C17.2@16.85,18.213 16.886,18.177 v1(16.886,17.35) ; C7.2@19.4,14.4 v1(20.95,14.4) ; C6.2@19.4,15.55 19.543,15.407 20.535,15.407 v1(20.55,15.392)
  Bottom Layer w0.254: v1(15.825,8.8) 15.825,9.825 16.4,10.4 C8.2@16.4,10.454 ; v1(16.5,9.25) 16.817,9.25 17.768,10.2 C10.2@17.768,10.375 ; C16.2@17.873,17.993 18.543,17.993 18.75,18.2 v1(18.75,18.6)
RF: L4.2 XX1.1 XX2.1 | length 2.8
  Top Layer w0.115: XX1.1@10.356,28.65 11.697,28.65 L4.2@11.847,28.8 XX2.1@11.847,30.038
  Top Layer w0.203: XX2.1@11.847,30.038 XX2.1@11.859,30.05
Spare_I2C.SCL: U5.D1
Spare_I2C.SDA: U5.B34 | length 0.1
  Top Layer w0.1: U5.B34@16.45,16 U5.B34@16.524,16.075
SPI_CS0_1V8: U1.7 U5.A5 U6.17 | length 61.1
  Top Layer w0.1: U1.7@4.254,1.975 8.395,1.975 v2(8.753,1.617) ; v1(10.305,14.3) 10.825,13.78 11.445,13.78 11.447,13.777 12.377,13.777 U5.A5@12.45,13.85 ; v2(19.45,33.75) 19.571,33.629 U6.17@19.571,31.475
  Signal Layer 1 w0.1: v1(10.305,14.3) 12.035,14.3 14.637,16.902 14.637,18.74 14.633,18.745 14.633,19.055 18.227,22.65 22.308,22.65 26.358,26.701 26.358,31.592 23.75,34.2 19.9,34.2 v2(19.45,33.75)
  Signal Layer 3 w0.1: v2(8.753,1.617) 7.358,3.011 7.358,5.672 11.932,10.246 11.932,13.292 10.925,14.3 v1(10.305,14.3)
SPI_CS0_3V0: P2.4 U1.10 | length 22.2
  Top Layer w0.1: 1.55,3.55 v1(2.2,2.9)
  Top Layer w0.15: P2.4@0.4,10.17 1.55,9.02 1.55,3.55
  Top Layer w0.203: U1.10@9.954,1.975 9.892,1.913 v1(12.885,1.913)
  Signal Layer 1 w0.1: v1(2.2,2.9) 3.082,2.018
  Signal Layer 1 w0.203: 3.082,2.018 12.779,2.018 v1(12.885,1.913)
SWDCLK: P4.3 U6.25 | length 28
  Top Layer w0.203: v2(13.137,31.95) 13.885,31.202 14.455,31.202 14.459,31.198 15.173,31.198 15.721,30.65 U6.25@15.946,30.65
  Signal Layer 3 w0.1: v2(13.137,31.95) 16.696,31.95 17.046,31.6 25.25,31.6 25.9,32.25 25.9,34.967 26.783,35.85 30.45,35.85 30.851,35.449 30.851,33.351 30.43,32.93 P4.3@29.835,32.93
SWDIO: P4.2 U6.26 | length 16.6
  Top Layer w0.203: v2(14.25,30.8) 15.099,30.8 15.649,30.25 U6.26@15.946,30.25
  Signal Layer 3 w0.203: v2(14.25,30.8) 14.625,30.8 14.925,31.1 27.675,31.1 28.235,31.66 P4.2@28.565,31.66
VBATT: C50.2 C51.2 CObat1.1 SW2.2 U7.3 | length 11
  Top Layer w0.305: C51.2@15.5,3.595 C51.2@15.462,3.633 15.492,3.663 U7.3@17.405,3.663
  Top Layer w0.5: C51.2@15.462,3.633 15.462,2.281 16.621,1.123 SW2.2@16.621,-1.429
  Top Layer w0.6: CObat1.1@13.836,-2.95 15.1,-2.95 SW2.2@16.621,-1.429
VCOM: C2.1 C5.1 C23.2 C24.2 C27.1 C32.1 C33.2 C46.2 R2.2 U1.15 U2.15 U3.1 U4.5 U5.A34 U5.B31 | length 18.7
  Top Layer w0.254: v1(8.735,-1.3) C27.1@10.015,-1.3 ; U1.15@9.954,5.225 v1(11.65,5.225) ; U5.B31@17.952,16.023 18.102,16.173 18.119,16.173 18.447,16.502 18.447,16.548 U5.A34@18.45,16.55 18.452,16.553 18.452,16.752 19.223,17.523 v1(19.424,17.523) ; C5.1@26.51,10.221 26.51,9.214 C46.2@26.467,9.172 26.51,9.13 v2(27.45,9.13)
  Bottom Layer w0.203: v1(19.424,17.523) C24.2@20.75,17.523 22.048,17.523 C23.2@22.1,17.575
  Bottom Layer w0.254: v1(8.735,-1.3) U2.15@9.954,-1.3 ; C2.1@9.951,5.25 9.976,5.225 v1(11.65,5.225) ; v1(20.65,5.35) 20.522,5.478 C32.1@20.522,5.994 C33.2@21.517,5.994 ; C33.2@21.517,6.005 C33.2@21.517,5.994 ; v1(21.55,5.35) 21.517,5.383 C33.2@21.517,5.994 ; U4.5@22.85,5.499 22.601,5.499 22.106,5.994 C33.2@21.517,5.994 ; R2.2@23.16,8.822 23.16,8.141 v2(23.179,8.122) ; U3.1@26.585,9.42 26.46,9.295 26.626,9.13 v2(27.45,9.13)
  other v2: 28.683,12.677 28.652,13.742
VCOM_CF: C48.2 C49.1 P1.1 R3.2 SW2.1 U4.1 | length 17.1
  Top Layer w0.6: SW2.1@24.234,-1.45 24.234,0.25 30.1,6.117 P1.1@30.1,6.6
  Bottom Layer w0.203: R3.2@27.8,3.575 28.475,4.25 v4(28.87,4.25)
  Bottom Layer w0.4: U4.1@25.25,5.499 C48.2@27.554,5.499
  Bottom Layer w0.6: C48.2@27.554,5.499 28.999,5.499 P1.1@30.1,6.6
XC1: C36.1 U6.34 X1.1 | length 6.2
  Top Layer w0.1: C36.1@11.582,25.55 11.675,25.457 X1.1@11.675,24.375
  Top Layer w0.203: C36.1@11.582,25.55 12.79,25.55 14.29,27.05 U6.34@15.946,27.05
XC2: C45.1 U6.35 X1.3 | length 7.2
  Top Layer w0.203: C45.1@12.801,21.4 12.825,21.424 X1.3@12.825,22.925 14.25,24.35 14.25,26.138 14.762,26.65 U6.35@15.946,26.65
pads on no net: A1.2 J2.0.2 J2.1.2 M1.B5 M1.C5 P1.8 U2.7 U2.10 U5.A7 U5.A13 U5.A18 U5.A19 U5.A20 U5.A21 U5.A22 U5.A24 U5.A26 U5.A38 U5.B6 U5.B13 U5.B17 U5.B18 U5.B19 U5.B20 U5.B23 U5.B36 U5.D3 U6.4 U6.9 U6.44
copper on no net:
  other v3: 17.171,26.65 18.371,26.65 19.571,26.65 20.771,26.65 17.171,27.85 18.371,27.85 19.571,27.85 20.771,27.85 17.171,29.05 18.371,29.05 19.571,29.05 20.771,29.05 17.171,30.25 18.371,30.25 19.571,30.25 20.771,30.25

## Polygon pours and split planes (outlines as drawn)
GND on Signal Layer 1 "Bottom Layer-No Net" (solid, remove dead copper, shelved, pour order 8): 15.2,7.3 -0.9,7.3 -0.9,21.15 15.2,21.15
CHG_IN on Top Layer "Bottom Layer-No Net" (solid, remove dead copper, pour order 7): 21.174,3.75 23,3.75 28.509,9.259 29.2,9.95 31.3,9.95 31.3,8.4 28.838,8.4 25.637,3.82 24.254,3.1 21.174,3.1
VCOM_CF on Top Layer "Bottom Layer-No Net" (solid, remove dead copper, pour order 6): 23.657,-2.85 23.657,0.362 29.841,7.75 31.14,7.75 31.14,6.061 25.854,0.775 25.053,-0.027 25.053,-2.85
VCOM on Signal Layer 3 "Bottom Layer-No Net" (solid, remove dead copper, pour order 5): 31.2,12.241 26.916,12.241 24.65,14.508 23.183,15.975 21.15,15.975 19.916,15.975 18.9,16.991 18.8,17.091 18.8,17.816 18.916,17.816 19.15,18.05 19.4,18.3 23.515,18.3 26.025,18.3 31.2,13.125
GND on GND (split plane): 31.19,-3.69 -0.94,-3.69 -0.94,22.04 1.879,22.04 1.979,22.049 2.074,22.078 2.163,22.126 2.24,22.189 2.304,22.266 2.351,22.355 2.38,22.45 2.39,22.55 2.39,22.598 8.9,22.598 8.9,36.04 31.19,36.04
PULP_VCC on POWER (split plane): 25.123,22.258 25.007,22.143 23.957,21.093 23.925,21.051 23.905,21.002 23.898,20.95 23.898,20.334 22.464,18.9 19.947,18.9 19.895,18.893 19.846,18.873 19.804,18.841 18.688,17.724 18.655,17.682 18.635,17.633 18.628,17.581 18.628,17.17 18.635,17.118 18.655,17.069 18.688,17.027 19.516,16.199 19.558,16.167 19.606,16.147 19.658,16.14 20.772,16.14 21.198,15.714 21.198,13.911 21.039,13.752 19,13.752 18.948,13.745 18.899,13.725 18.857,13.693 17.932,12.768 17.9,12.726 17.88,12.677 17.873,12.625 17.873,9.159 17.166,8.452 15.432,8.452 11.841,12.043 11.8,12.075 11.751,12.095 11.699,12.102 11.438,12.102 10.031,13.509 10.77,14.248 11.775,14.248 11.827,14.255 11.876,14.275 11.918,14.307 13.559,15.948 15.15,15.948 15.202,15.955 15.251,15.975 15.293,16.007 15.325,16.049 15.345,16.098 15.352,16.15 15.352,17.784 17.143,19.575 17.175,19.616 17.195,19.665 17.202,19.717 17.202,22.848 25.123,22.848
VCOM on POWER (split plane): 31.19,8.202 27.478,8.202 27.426,8.195 27.377,8.175 27.335,8.143 27.303,8.101 27.283,8.052 27.276,8 27.276,3.336 25.67,1.73 19.796,1.73 19.744,1.724 19.695,1.703 19.693,1.702 15.5,1.702 15.448,1.695 15.399,1.675 15.357,1.643 11.669,-2.046 7.208,-2.046 7.152,-1.989 7.152,5.391 8.459,6.698 21.79,6.698 21.842,6.705 21.891,6.725 21.933,6.757 22.793,7.617 22.825,7.659 22.845,7.708 22.852,7.76 22.852,8.716 25.528,8.716 25.58,8.723 25.628,8.743 25.67,8.775 26.343,9.447 26.375,9.489 26.395,9.538 26.402,9.59 26.402,12.241 31.19,17.029
1V8 on POWER (split plane): 31.19,17.6 26.057,12.468 26.025,12.426 26.005,12.377 25.998,12.325 25.998,9.673 25.444,9.119 22.65,9.119 22.598,9.112 22.549,9.092 22.507,9.06 22.475,9.018 22.455,8.97 22.448,8.917 22.448,7.844 21.706,7.102 8.375,7.102 8.323,7.095 8.274,7.075 8.232,7.043 6.807,5.618 6.775,5.576 6.755,5.527 6.748,5.475 6.748,-2.073 6.755,-2.125 6.775,-2.174 6.807,-2.215 6.982,-2.39 7.024,-2.422 7.072,-2.442 7.125,-2.449 11.752,-2.449 11.805,-2.442 11.853,-2.422 11.895,-2.39 15.584,1.298 19.825,1.298 19.877,1.305 19.926,1.325 19.928,1.327 25.754,1.327 25.806,1.334 25.855,1.354 25.896,1.386 27.62,3.11 27.639,3.134 27.652,3.152 27.673,3.201 27.679,3.253 27.679,7.798 31.19,7.798 31.19,-3.69 -0.94,-3.69 -0.94,22.04 1.879,22.04 1.979,22.049 2.074,22.078 2.163,22.126 2.24,22.189 2.304,22.266 2.351,22.355 2.38,22.45 2.39,22.55 2.39,22.598 8.9,22.598 8.9,36.04 31.19,36.04

## Other copper
Top Layer:
  region net NetA1_1: 4.2,28.7 4.2,27.197 4.7,27.197 4.7,28.7 4.45,28.7
  region net NetA1_1: 8.902,27.397 4.199,27.397 4.199,26.897 8.902,26.897
  pour cut-out: 8.9,22.598 1.85,22.598 1.85,36.55 8.9,36.55
  text "SENTI SE OK ANTENNA (fatto verifica)" at -6.961,46.45 h0.76
  text "Controllare le rules" at -7.061,44.7 h0.76
  text "SERVE GUARDRING INDUTTANZA...SI" at -7.311,42.75 h0.76
  text "verifica di non lasciare floating ingresso del traslatore di livello" at -7.411,40.65 h0.76
Signal Layer 1:
  pour cut-out: 8.9,22.598 1.85,22.598 1.85,36.55 8.9,36.55
Signal Layer 3:
  pour cut-out: 8.9,22.598 1.85,22.598 1.85,36.55 8.9,36.55
Bottom Layer:
  pour cut-out: 8.9,22.598 1.85,22.598 1.85,36.55 8.9,36.55
GND (plane layer: these items are gaps in the copper):
  pour cut-out: 8.9,22.598 1.85,22.598 1.85,36.55 8.9,36.55
POWER (plane layer: these items are gaps in the copper):
  pour cut-out: 8.9,22.598 1.85,22.598 1.85,36.55 8.9,36.55
  lines w0.4: 12.993,6.9 21.29,6.9 21.79,6.9 22.65,7.76 22.65,8.917 25.528,8.917 26.2,9.59 26.2,12.325 31.75,17.875 ; 19.796,1.529 25.754,1.529 27.478,3.253 27.478,8 32.225,8 ; 19.825,1.5 15.5,1.5 11.752,-2.248 7.125,-2.248 6.95,-2.073 6.95,5.475 8.375,6.9 9.218,6.9 8.519,6.9 13.748,6.9 20.258,6.9 ; 9.745,13.509 10.686,14.45 11.775,14.45 13.475,16.15 15.15,16.15 15.15,17.867 17,19.717 17,23.05 19.534,23.05 24.1,23.05 25.325,23.05 25.325,22.175 25.15,22 24.1,20.95 24.1,20.25 22.548,18.698 19.947,18.698 18.83,17.581 18.83,17.17 19.658,16.342 20.856,16.342 21.4,15.797 21.4,13.828 21.122,13.55 19,13.55 18.075,12.625 18.075,9.075 17.25,8.25 15.349,8.25 11.699,11.9 11.354,11.9 9.745,13.509

## Silkscreen, mask and mechanical layers (free items; w line width, h text height)
Top Overlay:
  text "GND" at 4.775,20.375 h0.76
  text "1V8" at 4.825,18.65 h0.76
  text "SCL" at 10.775,18.65 h0.76
  text "GND" at 22.025,5.2 h0.76
  text "Top" at 22.025,-1.7 h0.76
Bottom Overlay:
  text "Bot" at 1.6,-3.6 h0.76
Mechanical 4:
  lines w0: -8.9,36.737 -8.9,37.05 ; 1.9,36.237 1.9,23.7 1.9,22.55 1.275,22.55 -1.45,22.55 -1.45,-3.372 -1.45,-4.2 -0.45,-4.2 4.55,-4.2 9,-4.2 19,-4.2 ; 1.9,36.55 31.7,36.55 31.7,35.3 31.7,33.4 31.7,-4.05 31.55,-4.2 29.6,-4.2 ; 25.5,-4.2 28,-4.2 29.6,-4.2 ; 29.6,-4.2 29.6,-4.2
Top Mechanical 12/Mechanical 22:
  lines w0.1: -1.45,-4.65 31.7,-4.65 31.7,35.3 31.65,35.35 31.65,36.55 1.95,36.55 1.95,22.65 -1.45,22.65 -1.45,-4.65
Bottom Mechanical 12/Mechanical 22 (Mech22):
  lines w0.1: 12.475,22.525 12.475,27.525 15.5,27.525 15.5,22.525 ; 12.5,22.5 15.5,22.5
  text "ANT" at 14.7,27 h0.76 r90

## Text inside footprints (layer, text, board x,y; h text height)
SW2: Top Overlay "ON" at 23.517,-3.534 h0.76; Top Overlay "OFF" at 15.759,-3.6 h0.76